# Altium PCB V8.PCBDOC
Units mm, origin at the board's own origin, x right, y up, seen from the top; angles counter-clockwise.
Board outline 177.64 x 101.09 mm, 2 copper layers (Top Layer, Bottom Layer); 61 components, 51 nets, 232 pads, 60 vias.
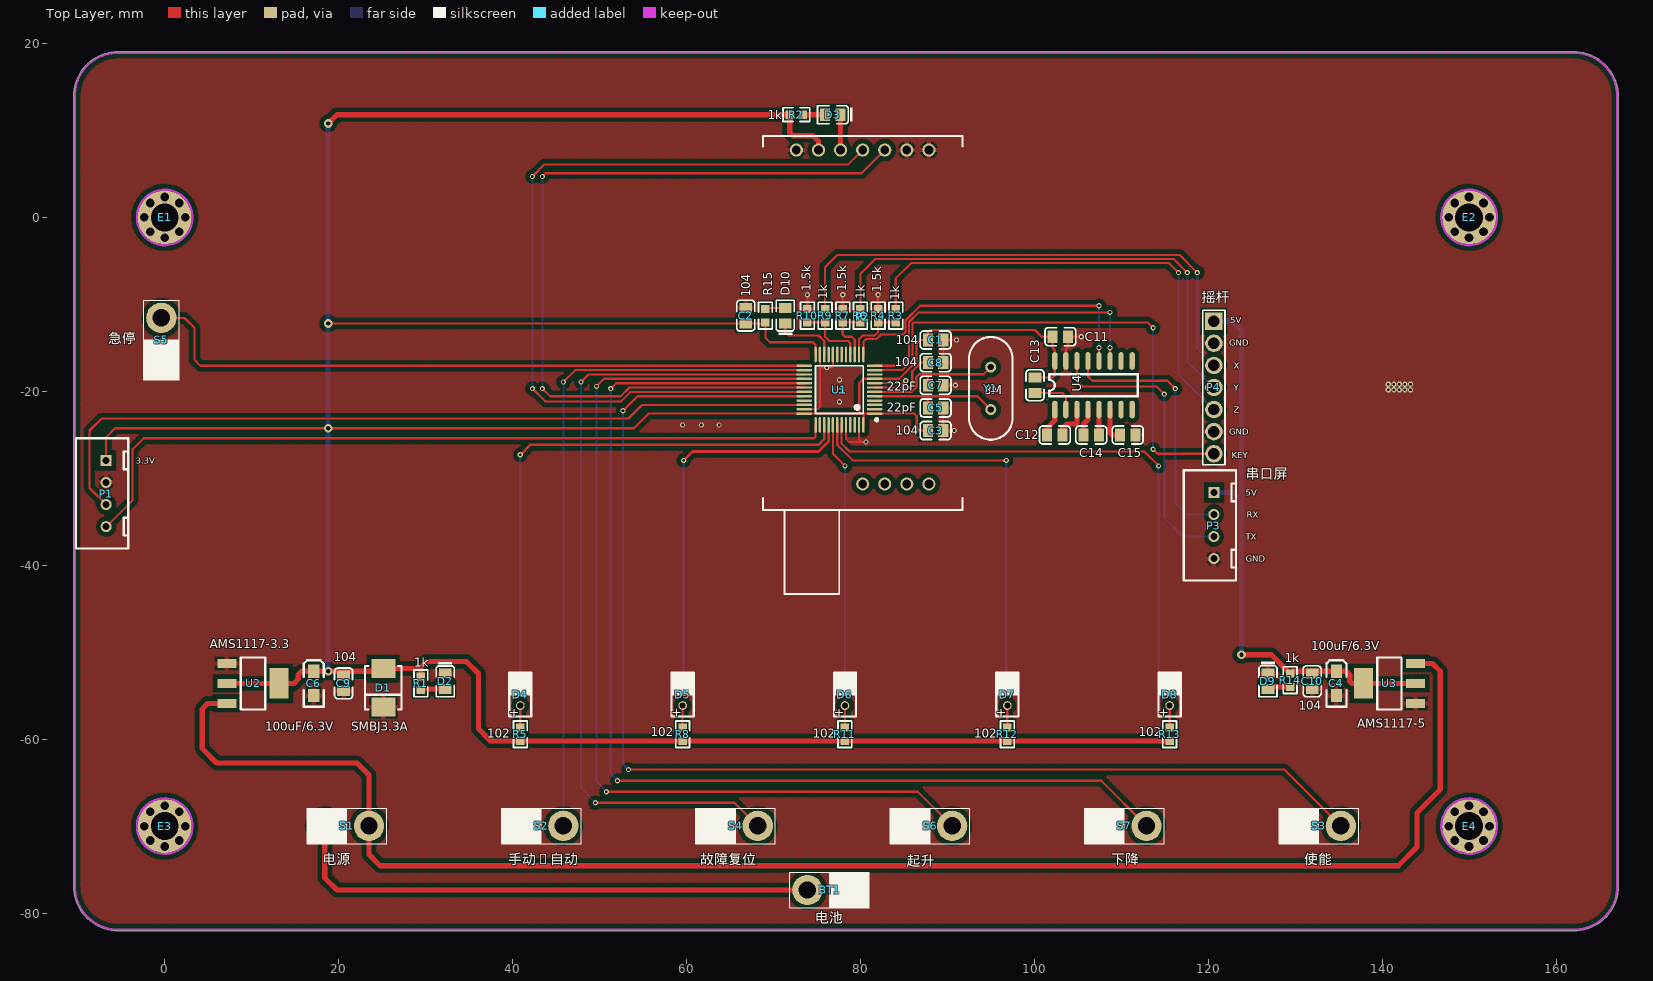
[diagram p0: Top Layer view]
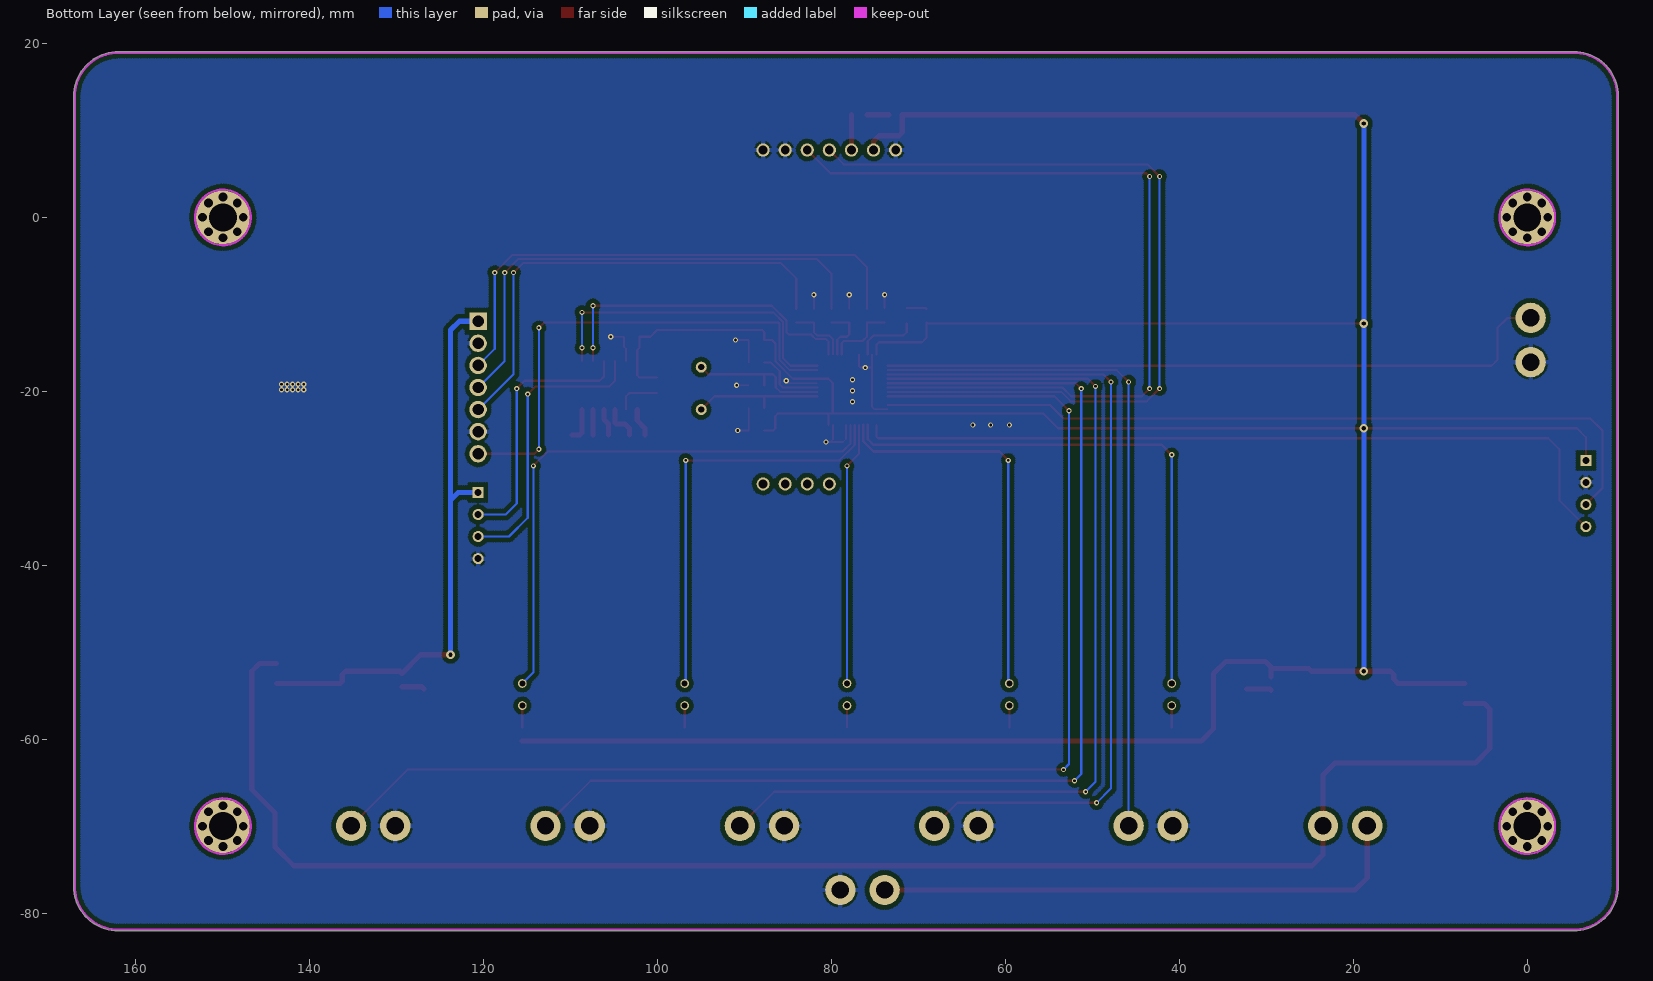
[diagram p1: Bottom Layer view, seen from below]
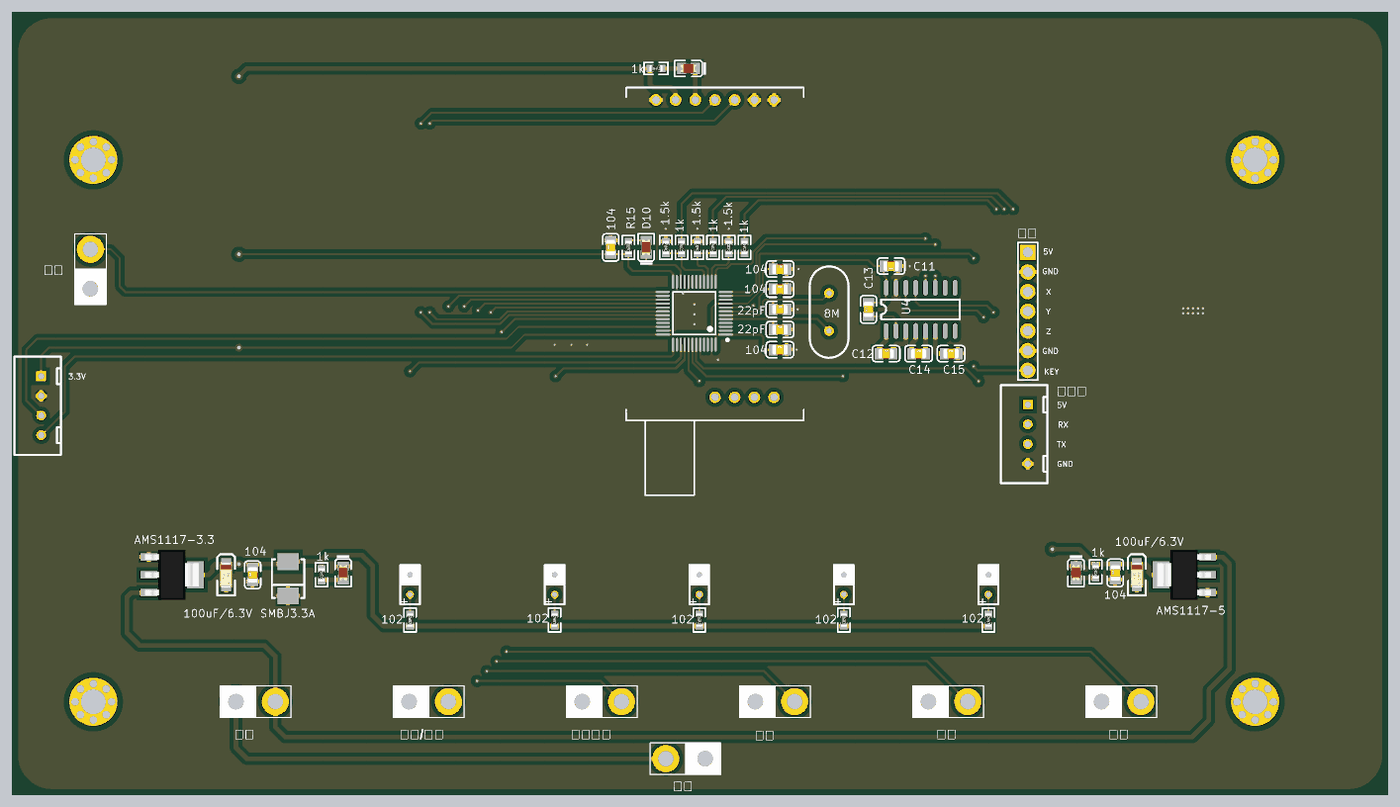
[diagram p2: 3D render of the assembled board from above, using the file's embedded part models]

## Layer stack, top to bottom
Top Solder: solder mask 0.0102, Solder Resist, Dk 3.5
Top Layer: signal copper 0.0356
Dielectric1: dielectric 0.32, FR-4, Dk 4.8
Bottom Layer: signal copper 0.0356
Bottom Solder: solder mask 0.0102, Solder Resist, Dk 3.5

## Board outline
-10.473,-76.899 cw(c-5.346,-76.898) -10.473,-76.898 -10.473,13.94 cw(c-10.346,13.94) -10.473,13.941 cw(c-5.346,13.94) -5.346,19.067 cw(c-5.346,18.94) -5.345,19.067 161.995,19.067 cw(c161.995,13.891) 167.17,13.891 167.17,-76.959 cw(c167.043,-76.959) 167.17,-76.97 cw(c162.043,-76.898) 162.043,-82.025 -5.346,-82.025 cw(c-5.346,-81.898) -5.348,-82.025 ccw(c-5.346,-76.898) -5.346,-82.025 -5.348,-82.025 cw(c-5.346,-76.898)

## Design rules (kind name [scope] priority, off if disabled: settings)
Clearance poly [InPolygon] p1: gap=0.508
Clearance [All] p2: gap=0.152
FabricationTestpoint [(IsPad And (OnTopLayer Or OnBottomLayer))] p1: side=3 testpointundercomponent=TRUE minsize=1.016 maxsize=2.54 preferedsize=1.524 minholesize=0 maxholesize=1.016 preferedholesize=0.813 testpointgrid=0.025 allowsidetop=TRUE allowsidebottom=TRUE usegrid=TRUE gridtolerance=0
HoleSize [All] p1: absolutevalues=TRUE maxlimit=5 minlimit=0.025 maxpercent=80.000 minpercent=20.000
PlaneConnect gndvia [All] p1: planeconnectstyle=Relief reliefexpansion=1.2 reliefentries=4 reliefconductorwidth=0.6 reliefairgap=0.6
PlaneConnect [All] p2: planeconnectstyle=Relief reliefexpansion=0.508 reliefentries=4 reliefconductorwidth=0.254 reliefairgap=0.254
PolygonConnect via [IsVia] p1: connectstyle=Direct reliefconductorwidth=0.254 reliefentries=4 polygonreliefangle="90 Angle" airgapwidth=0.254
PolygonConnect [All] p2: connectstyle=Relief reliefconductorwidth=0.508 reliefentries=4 polygonreliefangle="90 Angle" airgapwidth=0.254
RoutingVias [All] p1: holewidth=0.4 width=0.8 viastyle="Through Hole" minholewidth=0.4 minwidth=0.8 maxholewidth=1.016 maxwidth=2.032
SolderMaskExpansion [All] p1: expansion=0.102
UnpouredPolygon [All] p1: allowunpoured=FALSE
Width [All] p1 off: maxlimit=2.5 minlimit=0.254 preferedwidth=0.254
26 further rules are at their usual default settings.

## Components (designator, comment, footprint, x,y, rotation, side; value= is the part's Value field where it differs from the comment)
BT1 "电池" KEY/SW 78.994,-77.343 r0 top
C1 "104" 0805_C 88.646,-14.097 r0 top
C2 "104" 0805_C 66.812,-11.303 r90 top
C3 "104" 0805_C 88.646,-24.511 r0 top
C4 "100uF/6.3V" 3216 134.747,-53.594 r90 top
C5 "22pF" 0805_C 88.646,-21.907 r0 top
C6 "100uF/6.3V" 3216 17.145,-53.594 r90 top
C7 "22pF" 0805_C 88.646,-19.304 r0 top
C8 "104" 0805_C 88.646,-16.7 r0 top
C9 "104" 0805_C 20.574,-53.594 r90 top
C10 "104" 0805_C 131.953,-53.34 r90 top
C11 "0.1uF" 0805_C 102.997,-13.716 r180 top
C12 "0.1uF" 0805_C 102.362,-25.019 r0 top
C13 "0.1uF" 0805_C 100.076,-19.304 r90 top
C14 "0.1uF" 0805_C 106.553,-25.019 r0 top
C15 "0.1uF" 0805_C 110.744,-25.019 r0 top
D1 "SMBJ3.3A" SMB(DO-214AA)_S1 25.146,-54.094 r90 top
D2 "LED0" LC-0805_LED_S1 32.258,-54.233 r270 top
D3 "LED0" LC-0805_LED_S1 75.946,11.811 r180 top
D4 "LED2" LED1 40.894,-53.594 r270 top
D5 "LED2" LED1 59.563,-53.594 r270 top
D6 "LED2" LED1 78.232,-53.594 r270 top
D7 "LED2" LED1 96.901,-53.594 r270 top
D8 "LED2" LED1 115.57,-53.594 r270 top
D9 "LED0" LC-0805_LED_S1 126.873,-54.229 r270 top
D10 "LED0" LC-0805_LED_S1 71.374,-10.414 r90 top
E1 "Antenna" "定位孔 Φ3.2" 0,0 r180 top locked
E2 "Antenna" "定位孔 Φ3.2" 150,0 r180 top locked
E3 "Antenna" "定位孔 Φ3.2" 0,-70 r180 top locked
E4 "Antenna" "定位孔 Φ3.2" 150,-70 r180 top
P1 "Header 4" IDE4 -6.731,-27.94 r270 top
P2 "Header 7" AS50-T27 72.644,7.747 r270 top locked
P3 "串口屏" IDE4 120.65,-31.623 r270 top
P4 "摇杆" HDR1X7 120.65,-11.938 r270 top
R1 "1k" 0603_R 29.464,-53.594 r270 top
R2 "1k" 0603_R 72.644,11.811 r0 top
R3 "1k" 0603_R 84.074,-11.303 r270 top
R4 "1.5k" 0603_R 82.042,-11.303 r90 top
R5 "102" 0603_R 40.894,-59.436 r270 top
R6 "1k" 0603_R 80.01,-11.303 r270 top
R7 "1.5k" 0603_R 77.978,-11.303 r90 top
R8 "102" 0603_R 59.563,-59.436 r270 top
R9 "1k" 0603_R 75.946,-11.303 r270 top
R10 "1.5k" 0603_R 73.914,-11.303 r90 top
R11 "102" 0603_R 78.232,-59.436 r270 top
R12 "102" 0603_R 96.901,-59.436 r270 top
R13 "102" 0603_R 115.57,-59.436 r270 top
R14 "1k" 0603_R 129.413,-53.213 r270 top
R15 "1k" 0603_R 69.088,-11.303 r90 top
S1 "电源" KEY/SW 18.415,-69.977 r180 top
S2 "手动/自动" KEY/SW 40.767,-69.977 r180 top
S3 "使能" KEY/SW 130.175,-69.977 r180 top
S4 "故障复位" KEY/SW 63.119,-69.977 r180 top
S5 "急停" KEY/SW -0.381,-16.637 r270 top
S6 "起升" KEY/SW 85.471,-69.977 r180 top
S7 "下降" KEY/SW 107.823,-69.977 r180 top
U1 "STM32F103C8T6" LQFP-48_7x7x05P 77.597,-19.812 r90 top
U2 "AMS1117-3.3" LC-SOT-223 10.16,-53.594 r180 top
U3 "AMS1117-5" LC-SOT-223 140.843,-53.594 r0 top
U4 "MAX3232CUE" SO-16 102.362,-22.098 r90 top
Y1 "8M" XTAL_US 94.996,-22.098 r90 top

## Footprints (in the part's own frame and the unit in brackets; to place one, negate y for a bottom-side part, rotate by r counter-clockwise, add the part's x,y. Pads: shape width x height; smd on the part's side, far side on the other; paste and mask are expansions set on the pad)
0603_R [mm]
  rect 0.93x0.98 smd: 1(-0.77,0) 2(0.77,0)
  silkscreen extent -1.53,-0.79 1.54,0.79, body extent -0.85,-0.4 0.85,0.4, height 0.56
0805_C [mm]
  rect 1.16x1.47 smd: 1(-0.89,0) 2(0.89,0)
  silkscreen extent -1.77,-1.04 1.77,1.04, body extent -1,-0.62 1,0.63, height 0.77
3216 [mil]
  rect 60x50 smd: 1(55,0) 2(-55,0)
  silkscreen extent -105,-45 105,45, body extent -65,-31 61,32, height 63
AS50-T27 [mm]
  round 1.5 hole 1: 0(38.4,7.62) 0(38.4,10.16) 0(38.4,12.7) 0(38.4,15.24)
  round 1.524 hole 1: 1(0,0) 2(0,2.54) 3(0,5.08) 4(0,7.62) 5(0,10.16) 6(0,12.7) 7(0,15.24)
  silkscreen extent -1.6,-3.85 51.05,19.09
HDR1X7 [mm] "Connector; Header; 7 Position"
  rect 2x2 hole 1.3: 1(0,0)
  round 2 hole 1.3: 2(2.54,0) 3(5.08,0) 4(7.62,0) 5(10.16,0) 6(12.7,0) 7(15.24,0)
  silkscreen extent -1.27,-1.27 16.51,1.27
IDE4 [mil]
  rect 50x50 hole 32: 1(0,0)
  round 50 hole 32: 2(100,0) 3(200,0) 4(300,0)
  silkscreen extent -100,-136 399,100
KEY/SW [mm]
  round 3.5 hole 2: 1(-5.08,0) 2(0,0)
  silkscreen extent -7.11,-2.03 2.03,2.03
LC-0805_LED_S1 [mm]
  rect 1.16x1.47 smd: A(0.001,0) K(-1.779,0)
  silkscreen extent -3.13,-1.04 0.88,1.03, body extent -1.9,-0.62 0.12,0.62, height 1.1
LC-SOT-223 [mm]
  rect 2.2x1 smd: 1(3,-2.3) 2(3,0) 3(3,2.3)
  rect 2.2x3.5 smd: 2(-3,0)
  silkscreen extent -1.4,-3 1.4,3, body extent -3.49,-3.24 3.49,3.24, height 1.64
LED1 [mm]
  round 1 hole 0.7: 1(2.54,0) 2(0,0)
  silkscreen extent -1.27,-1.27 3.81,1.27
LQFP-48_7x7x05P [mm]
  oval 0.28x1.8 smd mask+0.051: 1(-2.75,-4.05) 2(-2.25,-4.05) 3(-1.75,-4.05) 4(-1.25,-4.05) 5(-0.75,-4.05) 6(-0.25,-4.05) 7(0.25,-4.05) 8(0.75,-4.05) 9(1.25,-4.05) 10(1.75,-4.05) 11(2.25,-4.05) 12(2.75,-4.05) 25(2.75,4.05) 26(2.25,4.05) 27(1.75,4.05) 28(1.25,4.05) 29(0.75,4.05) 30(0.25,4.05) 31(-0.25,4.05) 32(-0.75,4.05) 33(-1.25,4.05) 34(-1.75,4.05) 35(-2.25,4.05) 36(-2.75,4.05)
  oval 1.8x0.28 smd mask+0.051: 13(4.05,-2.75) 14(4.05,-2.25) 15(4.05,-1.75) 16(4.05,-1.25) 17(4.05,-0.75) 18(4.05,-0.25) 19(4.05,0.25) 20(4.05,0.75) 21(4.05,1.25) 22(4.05,1.75) 23(4.05,2.25) 24(4.05,2.75) 37(-4.05,2.75) 38(-4.05,2.25) 39(-4.05,1.75) 40(-4.05,1.25) 41(-4.05,0.75) 42(-4.05,0.25) 43(-4.05,-0.25) 44(-4.05,-0.75) 45(-4.05,-1.25) 46(-4.05,-1.75) 47(-4.05,-2.25) 48(-4.05,-2.75)
  silkscreen extent -3.6,-4.43 2.75,2.75
SMB(DO-214AA)_S1 [mm]
  rect 2.159x2.743 smd: 1(2.21,0) 2(-2.21,0)
  silkscreen extent -2.5,-2.1 2.5,2.1
SO-16 [mil]
  oval 80x24 smd: 1(0,0) 2(0,-50) 3(0,-100) 4(0,-150) 5(0,-200) 6(0,-250) 7(0,-300) 8(0,-350) 9(220,-350) 10(220,-300) 11(220,-250) 12(220,-200) 13(220,-150) 14(220,-100) 15(220,-50) 16(220,0)
  silkscreen extent 60,-375 160,25
XTAL_US [mil]
  round 50 hole 28: 1(0,0) 2(192.13,0)
  silkscreen extent -137,-98 329,98
"定位孔 Φ3.2" [mm]
  round 1 hole 1 unplated: 1(-2.35,0) 1(-1.662,1.662) 1(-1.662,-1.662) 1(0,2.35) 1(0,-2.35) 1(1.662,1.662) 1(1.662,-1.662) 1(2.35,0)
  round 6.2 hole 3.2: 1(0,0)
  Keep-Out Layer circle w0.254: c0,0 r3.2

## Part data
BT1: library part Battery, "Multicell Battery"
C1 C2 C3 C5 C7 C8 C12 C13 C14 C15: library part Cap, "Capacitor"
C4 C6: library part CAP
C9 C10: library part C
C11: library part C_2
D1: library part "Diode 18TQ045", "Schottky Rectifier"
D2 D3 D9 D10: "Typical INFRARED GaAs LED"
D4 D5 D6 D7 D8: "Typical RED, GREEN, YELLOW, AMBER GaAs LED"
E1 E2 E3 E4: "Generic Antenna"
P1: "Header, 4-Pin"
P2: "Header, 7-Pin"
P3: library part "Header 4", "Header, 4-Pin"
P4: library part "Header 7", "Header, 7-Pin"
R1 R2 R3 R4 R5 R6 R7 R8 R9 R10 R11 R12 R13 R14 R15: library part R_2
S1 S3 S5: library part SW-SPST, "Single-Pole, Single-Throw Switch"
S2 S4 S6 S7: library part SW-PB, "Switch"
U1: library part stm32f103v8t6
U2 U3: library part AMS1117
Y1: library part XTAL, "Crystal Oscillator"

## Via types
v1: diameter 0.6, hole 0.3, Top Layer to Bottom Layer, tented both sides, 55 vias
v2: diameter 1, hole 0.5, Top Layer to Bottom Layer, tented both sides, 5 vias

## Nets (pads, with @x,y where several pads share a name; then routed paths per layer and width w, separated by ;. In a path a pad name is that pad's centre, name@x,y a point inside that pad or via, vN(x,y) a via of type N, cw(c..) or ccw(c..) an arc to the next point about the centre after c; other vN are vias at no path point)
ADC4: R3.2 R4.1 U1.14 | length 7.4
  Top Layer w0.254: U1.14 79.847,-14.006 80.264,-13.589 81.661,-13.589 82.042,-13.208 R4.1 R3.2
ADC5: R6.2 R7.1 U1.15 | length 6.7
  Top Layer w0.254: U1.15 79.347,-14.069 78.994,-13.716 78.232,-13.716 77.978,-13.462 R7.1 R6.2
ADC6: R9.2 R10.1 U1.16 | length 8.2
  Top Layer w0.254: R10.1 R9.2 75.946,-13.716 76.454,-14.224 78.613,-14.224 78.847,-14.458 U1.16
AUX: D3.K P2.3 | length 4.1
  Top Layer w0.6: P2.3 77.725,7.748 D3.K D3.K@77.724,11.81
GND: BT1.2 C1.2 C2.2 C3.2 C4.2 C5.2 C6.2 C7.2 C8.2 C9.1 C10.1 C11.1 C15.2 D1.2 D2.K D9.K P1.2 P2.1 P2.6 P2.7 P3.4 P4.2 P4.6 R4.2 R7.2 R10.2 S2.2 S3.2 S4.2 S5.2 S6.2 S7.2 U1.8 U1.20 U1.23 U1.35 U1.44 U1.47 U2.1 U3.1 U4.15 | length 39.4
  Top Layer w0.203: U1.35 75.093,-22.062 75.347,-21.808 75.347,-17.054 ; R10.2@73.913,-10.413 73.914,-10.414 v1(73.914,-8.89) ; U1.23 75.347,-17.054 ; U1.20 76.847,-17.133 76.708,-17.272 v1(76.136,-17.272) 75.565,-17.272 75.347,-17.054 ; R7.2 v1(77.978,-8.891) ; U1.44 78.347,-25.478 78.692,-25.823 80.137,-25.823 ; U1.47 79.847,-25.533 80.137,-25.823 ; v1(80.645,-25.823) 80.137,-25.823 ; U1.8 84.951,-19.062 v1(85.217,-18.796) ; R4.2 v1(82.042,-8.895) ; C5.2 C3.2 v1(90.805,-24.511) ; C7.2 v1(90.932,-19.304) ; C8.2 C1.2 v1(91.059,-14.097) ; U4.15 103.632,-15.113 103.887,-14.858 C11.1 v1(105.41,-13.716)
  other v1: 59.563,-23.876 61.722,-23.876 63.754,-23.876 77.597,-21.209 77.597,-19.939 140.703,-19.812 141.351,-19.812 141.986,-19.812 142.621,-19.812 143.256,-19.812 140.716,-19.177 141.351,-19.177 141.986,-19.177 142.621,-19.177 143.256,-19.177 77.597,-18.669
JTCK: P1.4 U1.37 | length 90.6
  Top Layer w0.254: P1.4 -3.683,-32.512 -3.683,-26.67 -2.413,-25.4 74.676,-25.4 74.847,-25.229 U1.37
JTMS: P1.3 U1.34 | length 92.7
  Top Layer w0.254: P1.3 -8.636,-31.115 -8.636,-24.511 -7.239,-23.114 53.34,-23.114 54.892,-21.562 U1.34
KEY1: S2.1 U1.26 | length 79.3
  Top Layer w0.254: v1(45.847,-18.923) 47.208,-17.562 U1.26
  Bottom Layer w0.254: S2.1 v1(45.847,-18.923)
KEY2: S4.1 U1.27 | length 94.9
  Top Layer w0.254: v1(47.879,-18.923) 48.74,-18.062 U1.27 ; v1(49.53,-67.31) 65.532,-67.31 S4.1
  Bottom Layer w0.254: v1(47.879,-18.923) 47.879,-65.659 v1(49.53,-67.31)
KEY3: S6.1 U1.28 | length 112.7
  Top Layer w0.254: v1(49.657,-19.431) 50.526,-18.562 U1.28 ; v1(50.8,-66.04) 86.614,-66.04 S6.1
  Bottom Layer w0.254: v1(49.657,-19.431) 49.657,-64.897 v1(50.8,-66.04)
KEY4: S7.1 U1.29 | length 130.9
  Top Layer w0.254: v1(51.308,-19.685) 51.931,-19.062 U1.29 ; v1(52.07,-64.77) 107.696,-64.77 S7.1
  Bottom Layer w0.254: v1(51.308,-19.685) 51.308,-64.008 v1(52.07,-64.77)
KEY_X: P4.3 R9.1 | length 60.5
  Top Layer w0.254: R9.1 75.946,-5.715 77.343,-4.318 116.713,-4.318 v1(118.745,-6.35)
  Bottom Layer w0.254: v1(118.745,-6.35) 118.745,-15.113 P4.3
KEY_Y: P4.4 R6.1 | length 57.5
  Top Layer w0.254: R6.1 80.01,-6.477 81.712,-4.775 116.027,-4.775 v1(117.602,-6.35)
  Bottom Layer w0.254: v1(117.602,-6.35) 117.602,-16.51 P4.4
KEY_Z: P4.5 R3.1 | length 54.7
  Top Layer w0.254: R3.1 84.074,-7.01 85.852,-5.232 115.468,-5.232 v1(116.586,-6.35)
  Bottom Layer w0.254: v1(116.586,-6.35) 116.586,-18.034 P4.5
LED1: D4.2 U1.39 | length 63.6
  Top Layer w0.3: v1(40.894,-27.305) 42.037,-26.162 75.184,-26.162 75.847,-25.499 U1.39
  Bottom Layer w0.3: D4.2 v1(40.894,-27.305)
LED2: D5.2 U1.40 | length 45.2
  Top Layer w0.3: v1(59.69,-27.94) 60.706,-26.924 75.184,-26.924 76.347,-25.761 76.347,-25.714 76.35,-25.711 76.35,-23.865 U1.40
  Bottom Layer w0.3: D5.2 59.69,-53.467 v1(59.69,-27.94)
LED3: D6.2 U1.41 | length 30.3
  Top Layer w0.254: U1.41 76.847,-27.19 v1(78.232,-28.575)
  Bottom Layer w0.254: D6.2 v1(78.232,-28.575)
LED4: D7.2 U1.42 | length 48.2
  Top Layer w0.254: U1.42 77.347,-26.166 79.121,-27.94 v1(96.774,-27.94)
  Bottom Layer w0.254: v1(96.774,-27.94) 96.774,-53.467 D7.2
LED5: D8.2 U1.43 | length 65.4
  Top Layer w0.254: U1.43 77.847,-26.019 78.746,-26.918 112.643,-26.918 v1(114.3,-28.575)
  Bottom Layer w0.254: v1@114.427,-28.702 v1(114.3,-28.575) 114.3,-52.324 D8.2
NetC5_1: C5.1 U1.5 Y1.1 | length 15.2
  Top Layer w0.254: U1.5 89.535,-20.562 ; C5.1 87.756,-20.702 87.757,-20.701 ; 89.536,-20.563 89.535,-20.562 ; Y1.1 93.46,-20.562 89.535,-20.562
NetC7_1: C7.1 U1.6 Y1.2 | length 16.5
  Top Layer w0.254: U1.6 85.923,-20.062 86.432,-19.553 86.432,-18.343 86.741,-18.034 87.757,-18.034 ; C7.1 87.756,-18.035 87.757,-18.034 ; 89.536,-18.035 89.535,-18.034 ; Y1.2 94.18,-18.034 89.535,-18.034 ; 87.757,-18.034 89.535,-18.034
NetC8_1: C8.1 U1.7 | length 8.2
  Top Layer w0.254: U1.7 85.59,-19.562 85.975,-19.177 85.975,-17.692 86.966,-16.7 C8.1
NetC12_1: C12.1 U4.1 | length 3.3
  Top Layer w0.6: C12.1 101.472,-24.258 102.362,-23.368 U4.1
NetC12_2: C12.2 U4.3 | length 4.2
  Top Layer w0.6: C12.2 103.252,-24.256 103.759,-23.749 104.775,-23.749 104.902,-23.622 U4.3
NetC13_1: C13.1 U4.2 | length 5.2
  Top Layer w0.254: C13.1 103.252,-20.194 103.632,-20.574 U4.2
NetC14_1: C14.1 U4.4 | length 3.1
  Top Layer w0.6: C14.1 105.663,-23.75 106.172,-23.241 U4.4
NetC14_2: C14.2 U4.5 | length 2.9
  Top Layer w0.6: U4.5 107.442,-25.018 C14.2
NetC15_1: C15.1 U4.6 | length 3.9
  Top Layer w0.6: U4.6 108.712,-24.765 108.966,-25.019 C15.1
NetD2_A: D2.A R1.2 | length 2.8
  Top Layer w0.6: R1.2 29.594,-54.234 D2.A
NetD3_A: D3.A R2.2 | length 2.5
  Top Layer w0.6: R2.2 D3.A
NetD4_1: D4.1 R5.1 | length 2.5
  Top Layer w0.254: R5.1 D4.1
NetD5_1: D5.1 R8.1 | length 2.5
  Top Layer w0.254: R8.1 D5.1
NetD6_1: D6.1 R11.1 | length 2.5
  Top Layer w0.254: R11.1 D6.1
NetD7_1: D7.1 R12.1 | length 2.5
  Top Layer w0.254: R12.1 D7.1
NetD8_1: D8.1 R13.1 | length 2.5
  Top Layer w0.254: R13.1 D8.1
NetD9_A: D9.A R14.2 | length 2.6
  Top Layer w0.6: D9.A 127.12,-53.983 R14.2
NetD10_A: D10.A R15.2 | length 2.3
  Top Layer w0.254: R15.2 69.208,-10.413 D10.A
NetD10_K: D10.K U1.22 | length 7.4
  Top Layer w0.254: D10.K 71.374,-13.208 71.755,-13.589 75.184,-13.589 75.847,-14.252 U1.22
NetS1_1: S1.1 U2.3 U3.3 | length 183.7
  Top Layer w0.6: U2.3 4.939,-55.894 4.318,-56.515 4.318,-61.087 5.969,-62.738 22.098,-62.738 23.495,-64.135 S1.1 23.495,-73.279 24.765,-74.549 141.859,-74.549 144.018,-72.39 144.018,-68.453 146.685,-65.786 146.685,-52.197 145.782,-51.294 U3.3
PA2_U2_TX: U1.12 U4.11 | length 37.6
  Top Layer w0.254: U1.12 84.737,-17.062 85.598,-16.201 85.598,-12.024 86.7,-10.922 v1(108.712,-10.922) ; U4.11 v1(108.712,-14.986)
  Bottom Layer w0.254: v1(108.712,-14.986) v1(108.712,-10.922)
PA3_U2_RX: U1.13 U4.12 | length 37.4
  Top Layer w0.254: U1.13 80.347,-14.293 80.645,-13.995 81.829,-13.995 82.363,-13.462 84.938,-13.462 85.192,-13.208 85.192,-11.855 86.887,-10.16 v1(107.442,-10.16) ; U4.12 v1(107.442,-14.986)
  Bottom Layer w0.254: v1(107.442,-14.986) v1(107.442,-10.16)
SW1: S3.1 U1.32 | length 147.7
  Top Layer w0.254: v1(52.705,-22.225) 54.368,-20.562 U1.32 ; v1(53.34,-63.5) 128.778,-63.5 S3.1
  Bottom Layer w0.254: v1(52.705,-22.225) 52.705,-62.865 v1(53.34,-63.5)
SW2: S5.1 U1.25 | length 78.4
  Top Layer w0.254: S5.1 2.286,-11.557 3.429,-12.7 3.429,-16.383 4.108,-17.062 U1.25
SW3: P4.7 U1.11 | length 58.1
  Top Layer w0.254: U1.11 84.812,-17.562 86.004,-16.369 86.004,-12.192 86.106,-12.09 113.055,-12.09 v1(113.665,-12.7) ; v1(113.665,-26.67) 114.173,-27.178 P4.7
  Bottom Layer w0.254: v1(113.665,-26.67) v1(113.665,-12.7)
U1_RX: P2.4 U1.31 | length 95.9
  Top Layer w0.254: v1(42.291,-19.685) 43.764,-21.158 52.513,-21.158 53.61,-20.062 U1.31 ; v1(42.291,4.699) 43.688,6.096 78.613,6.096 P2.4
  Bottom Layer w0.254: v1(42.291,-19.685) v1(42.291,4.699)
U1_TX: P2.5 U1.30 | length 95.9
  Top Layer w0.254: v1(43.434,-19.685) 44.323,-20.574 52.451,-20.574 53.463,-19.562 U1.30 ; v1(43.434,4.699) 43.815,5.08 80.137,5.08 P2.5
  Bottom Layer w0.254: v1(43.434,-19.685) v1(43.434,4.699)
U2_RX: P3.2 U4.13 | length 30.6
  Top Layer w0.254: U4.13 106.172,-18.288 106.68,-18.796 115.316,-18.796 v1(116.205,-19.685)
  Bottom Layer w0.254: v1(116.205,-19.685) 116.205,-32.893 117.475,-34.163 P3.2
U2_TX: P3.3 U4.14 | length 33.8
  Top Layer w0.254: U4.14 104.902,-18.796 105.537,-19.431 114.046,-19.431 v1(114.935,-20.32)
  Bottom Layer w0.254: v1(114.935,-20.32) 114.935,-34.544 117.094,-36.703 P3.3
VCC: C4.1 C10.2 P3.1 P4.1 R14.1 U3.2 | length 66.6
  Top Layer w0.6: v2(123.825,-50.292) 127.262,-50.292 R14.1 129.659,-52.197 C4.1 135.89,-52.197 136.271,-52.578 136.271,-53.34 136.525,-53.594 137.843,-53.594 U3.2@143.843,-53.594
  Bottom Layer w0.6: P3.1 122.936,-31.623 123.825,-32.512 ; P4.1 122.809,-11.938 123.825,-12.954 123.825,-32.512 ; v2@123.825,-50.342 v2(123.825,-50.292) 123.825,-32.512
VCC3.3: C1.1 C2.1 C3.1 C6.1 C9.2 C11.2 C13.2 D1.1 P1.1 P2.2 R1.1 R2.1 R5.2 R8.2 R11.2 R12.2 R13.2 R15.1 U1.1 U1.9 U1.24 U1.36 U1.48 U2.2 U4.16 | length 439.5
  Top Layer w0.254: P1.1 -6.731,-25.273 -5.715,-24.257 v2(18.796,-24.257) 53.975,-24.257 55.67,-22.562 U1.36 79.883,-22.562 ; v2(18.797,-12.193) C2.1 68.968,-12.193 R15.1 69.088,-13.843 69.596,-14.351 74.549,-14.351 74.847,-14.649 U1.24 ; U1.48 80.347,-22.777 80.562,-22.562 ; C3.1 86.741,-24.511 86.487,-24.257 86.487,-22.86 86.189,-22.562 U1.1 80.562,-22.562 ; C13.2 102.109,-18.414 102.362,-18.161 U4.16 102.362,-15.24 102.107,-14.985 C11.2 100.84,-13.716 100.079,-12.955 88.011,-12.955 87.756,-13.21 C1.1 86.868,-14.097 86.462,-14.503 86.462,-16.559 84.458,-18.562 U1.9 80.371,-18.562 79.883,-19.05 79.883,-22.562 ; 79.883,-22.562 80.562,-22.562
  Top Layer w0.6: U2.2@7.16,-53.594 13.16,-53.594 14.859,-53.594 15.367,-53.086 15.367,-52.578 15.748,-52.197 C6.1 v2(18.796,-52.197) 24.833,-52.197 D1.1 29.269,-51.884 29.464,-51.689 ; v2(18.796,10.795) 19.812,11.811 R2.1 71.874,9.787 72.263,9.398 74.549,9.398 75.184,8.763 P2.2 ; R1.1 29.464,-51.689 ; R13.2 R12.2 R11.2 R8.2 R5.2 37.473,-60.206 36.076,-58.809 36.076,-52.459 34.671,-51.054 30.099,-51.054 29.464,-51.689
  Bottom Layer w0.6: v2(18.796,-52.197) v2(18.796,-24.257) v2(18.796,10.795)
VCC8: BT1.1 S1.2 | length 62
  Top Layer w0.6: S1.2 18.415,-75.946 19.812,-77.343 BT1.1
pads on no net: E1.1 E2.1 E3.1 E4.1 P2.0 U1.2 U1.3 U1.4 U1.10 U1.17 U1.18 U1.19 U1.21 U1.33 U1.38 U1.45 U1.46 U4.7 U4.8 U4.9 U4.10

## Polygon pours and split planes (outlines as drawn)
GND on Top Layer "Top Layer-No Net" (hatched 90Degree grid 0.203 track 0.203, remove dead copper, pour order 2): -10.795,19.685 167.64,19.685 167.64,-82.55 -10.795,-82.55 -10.795,19.685
GND on Bottom Layer "Top Layer-No Net" (hatched 90Degree grid 0.203 track 0.203, remove dead copper, pour order 4): -10.795,19.685 167.64,19.685 167.64,-82.55 -10.795,-82.55 -10.795,19.685

## Keep-outs
Keep-Out Layer:
  lines w0.254: 167.043,-76.959 167.043,13.891 ccw(c161.995,13.891) 161.995,18.94 -5.346,18.94 ccw(c-5.346,13.94) -10.346,13.94 -10.346,-76.898 ccw(c-5.346,-76.898) -5.346,-81.898 162.043,-81.898 ccw(c162.043,-76.898) 167.043,-76.898

## Silkscreen, mask and mechanical layers (free items; w line width, h text height)
Top Overlay:
  text "5V" at 122.555,-12.192 h0.7
  text "GND" at 122.428,-14.732 h0.7
  text "X" at 122.936,-17.399 h0.7
  text "Y" at 122.936,-19.939 h0.7
  text "Z" at 122.936,-22.479 h0.7
  text "GND" at 122.428,-25.019 h0.7
  text "KEY" at 122.682,-27.686 h0.7
  text "3.3V" at -3.302,-28.321 h0.7
  text "5V" at 124.333,-32.004 h0.7
  text "RX" at 124.46,-34.544 h0.7
  text "TX" at 124.333,-37.084 h0.7
  text "GND" at 124.333,-39.624 h0.7

## Text inside footprints (layer, text, board x,y; h text height)
D4: Top Overlay "+" at 39.751,-56.388 h1 r270
D5: Top Overlay "+" at 58.42,-56.388 h1 r270
D6: Top Overlay "+" at 77.089,-56.388 h1 r270
D7: Top Overlay "+" at 95.758,-56.388 h1 r270
D8: Top Overlay "+" at 114.427,-56.388 h1 r270